# Altium PCB PCB1.PcbDoc
Units mm, origin at the board's own origin, x right, y up, seen from the top; angles counter-clockwise.
Board outline 99.82 x 55.12 mm, 2 copper layers (Top Layer, Bottom Layer); 21 components, 18 nets, 137 pads, 9 vias.
Unrouted connection lines stored in the file: 1.
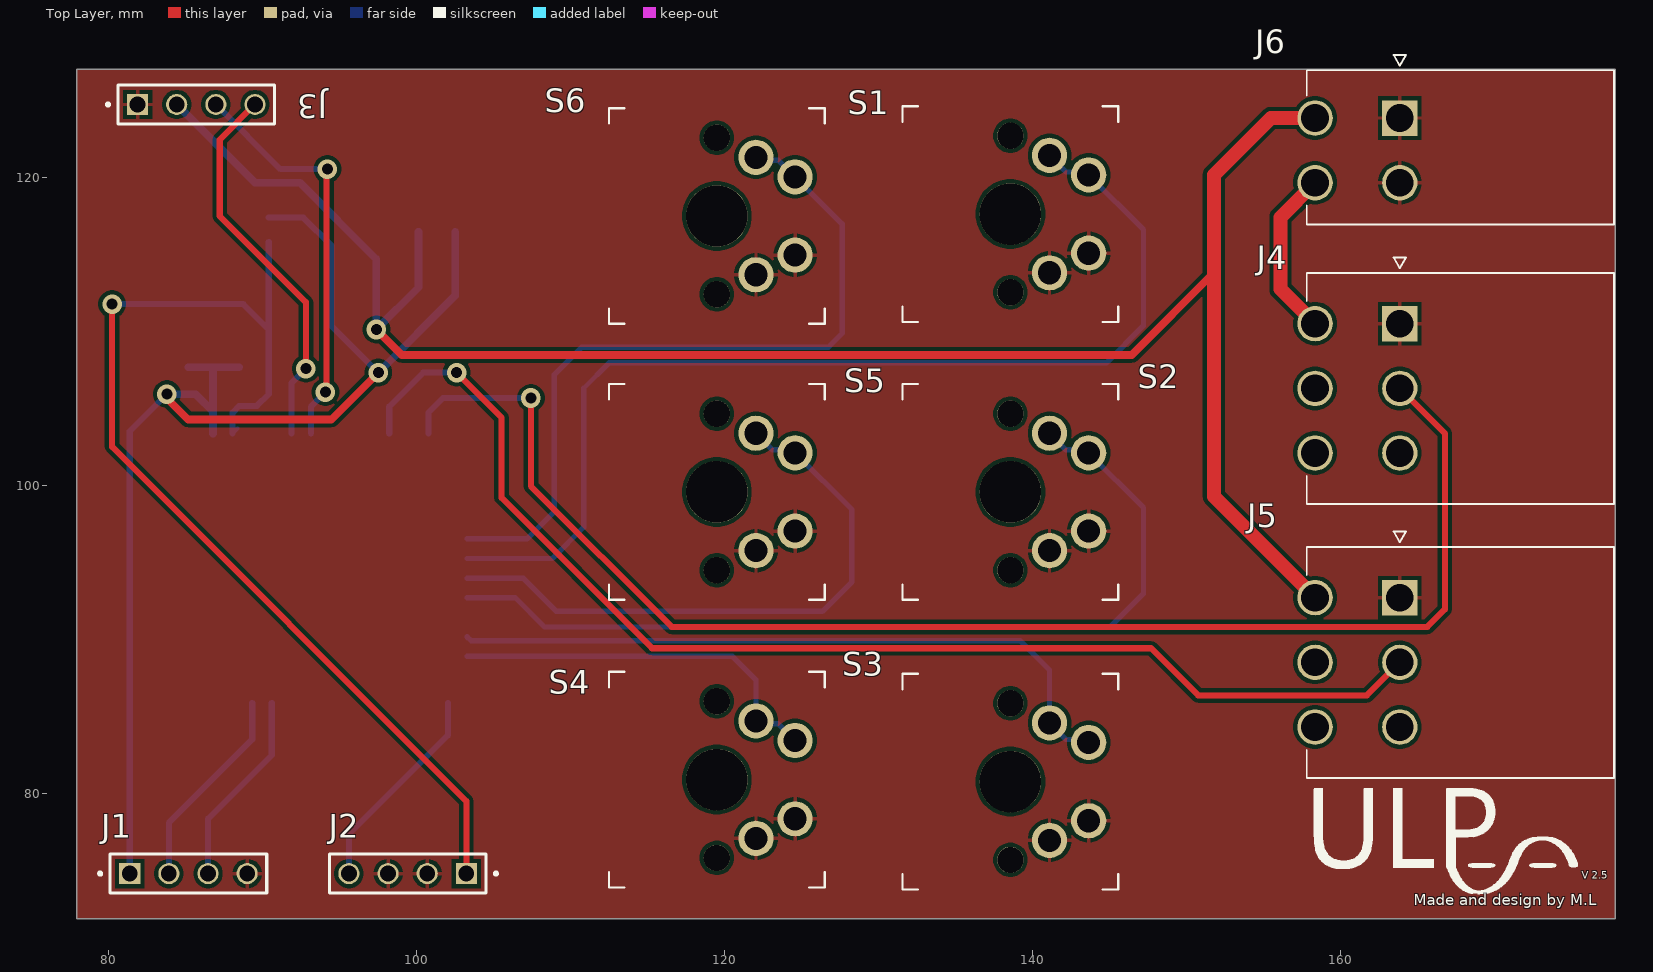
[diagram p0: Top Layer view]
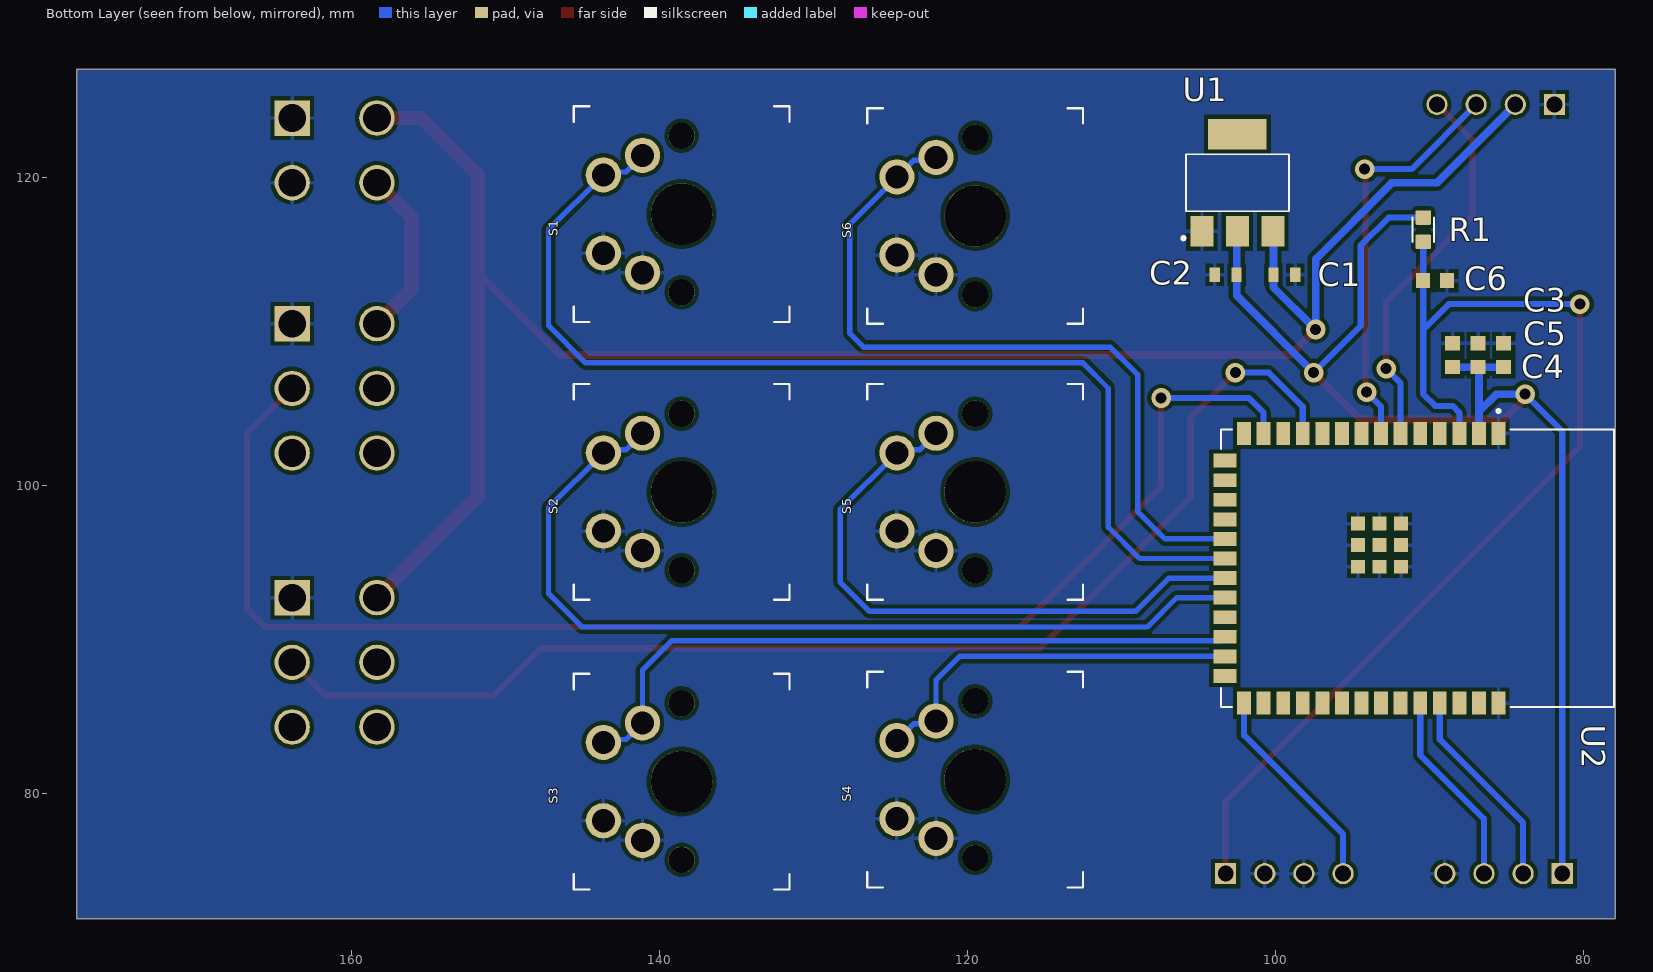
[diagram p1: Bottom Layer view, seen from below]
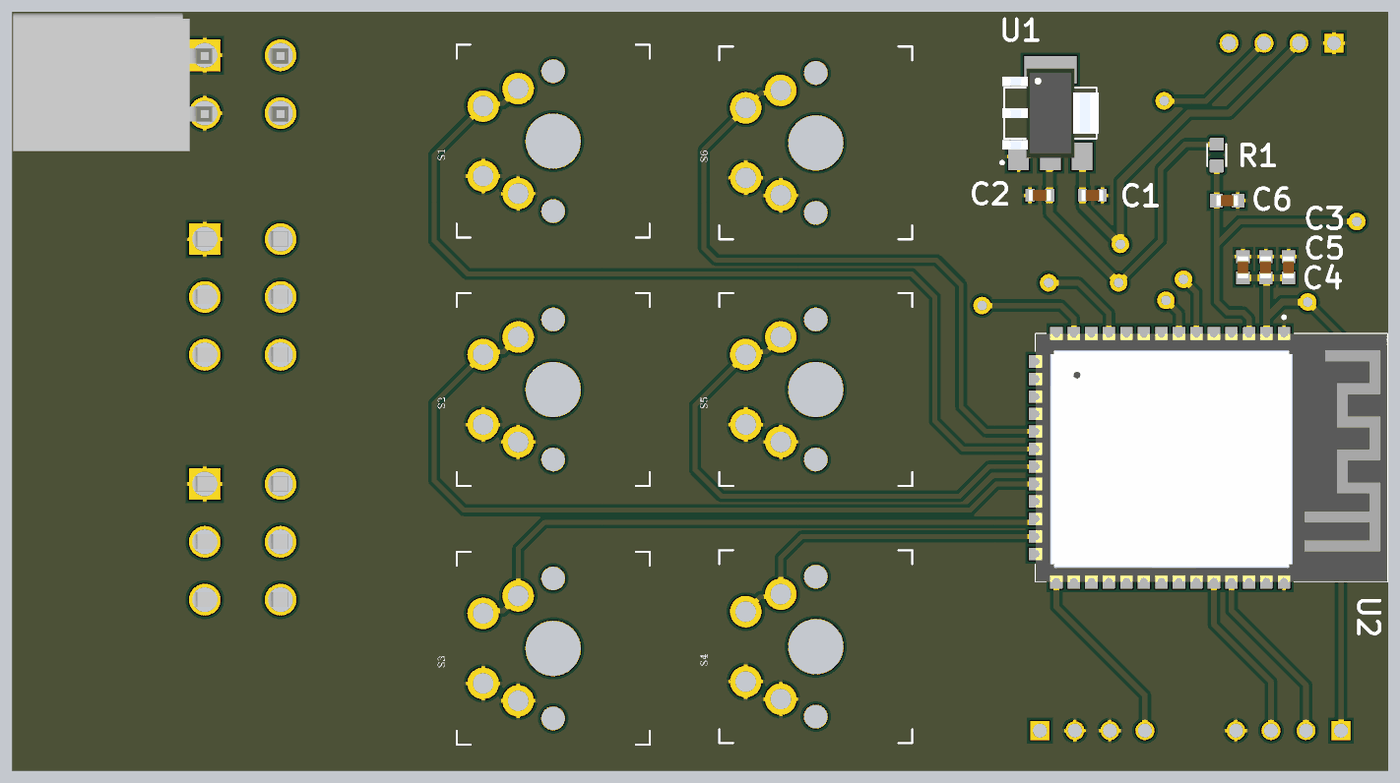
[diagram p2: 3D render of the assembled board from below, using the file's embedded part models]

## Layer stack, top to bottom
Top Solder: solder mask 0.0102, Solder Resist, Dk 3.5
Top Layer: signal copper 0.0356
Dielectric 1: dielectric 0.32, FR-4, Dk 4.8
Bottom Layer: signal copper 0.0356
Bottom Solder: solder mask 0.0102, Solder Resist, Dk 3.5

## Board outline
77.978,71.882 177.8,71.882 177.8,127 77.978,127

## Design rules (kind name [scope] priority, off if disabled: settings)
Clearance [All] p1: gap=0.254 ignorepadtopadclearanceinfootprint=FALSE except(0: Arc-Hole Track-Hole SMDPad-Hole THPad-Hole Via-Hole Fill-Hole Poly-Hole Region-Hole Text-Hole; 0.33: Arc-THPad Track-THPad)
PolygonConnect [All] p1: connectstyle=Relief reliefconductorwidth=0.254 reliefentries=4 polygonreliefangle="90 Angle" airgapwidth=0.254
RoutingVias [All] p1: holewidth=0.711 width=1.27 viastyle="Through Hole" minholewidth=0.711 minwidth=1.27 maxholewidth=0.711 maxwidth=1.27
SolderMaskExpansion [All] p1: expansion=0.102 istentingtop=FALSE
Width [All] p1: maxlimit=1 minlimit=0.254 preferedwidth=0.254 minimp=50.000000 maximp=50.000000 favimp=50.000000
30 further rules are at their usual default settings.

## Components (designator, comment, footprint, x,y, rotation, side; value= is the part's Value field where it differs from the comment)
C1 "CL10A106MO8NQNC" CAPC1608X90N#1 99.441,113.665 r0 bottom
C2 "CL10A106MO8NQNC" CAPC1608X90N#1 103.251,113.665 r180 bottom
C3 "06035C104KAT2A" CAPC1608X90N#2 88.519,108.445 r90 bottom
C4 "06035C104KAT2A" CAPC1608X90N#2 85.217,108.445 r90 bottom
C5 "06035C104KAT2A" CAPC1608X90N#2 86.868,108.445 r90 bottom
C6 "06035C104KAT2A" CAPC1608X90N#2 89.662,113.284 r0 bottom
J1 "TSW-104-23-F-S" SAMTEC_TSW-104-23-F-S 81.407,74.803 r0 top
J2 "TSW-104-23-F-S" SAMTEC_TSW-104-23-F-S 103.251,74.803 r180 top
J3 "TSW-104-23-F-S" SAMTEC_TSW-104-23-F-S 81.915,124.714 r0 top
J4 "874270602" *MOLEX_874270602 163.83,110.49 r90 top
J5 "874270602" *MOLEX_874270602 163.83,92.71 r90 top
J6 "353180420" *MOLEX_353180420 163.83,123.834 r90 top
R1 "0603SAF1002T5E" RESC1608X50N 90.424,116.586 r90 bottom
S1 "TL1107BF130WQ" SW_MX_reversible 138.557,117.602 r270 top
S2 "TL1107BF130WQ" SW_MX_reversible 138.557,99.568 r270 top
S3 "TL1107BF130WQ" SW_MX_reversible 138.557,80.772 r270 top
S4 "TL1107BF130WQ" SW_MX_reversible 119.507,80.899 r270 top
S5 "TL1107BF130WQ" SW_MX_reversible 119.507,99.568 r270 top
S6 "TL1107BF130WQ" SW_MX_reversible 119.507,117.475 r270 top
U1 "LD1117AS33TR" SOT230P700X180-4N 102.489,119.634 r180 bottom
U2 "ESP32-S3-WROOM-1-N4R2" XCVR_ESP32-S3-WROOM-1-N4R2 90.805,94.615 r270 bottom

## Footprints (in the part's own frame and the unit in brackets; to place one, negate y for a bottom-side part, rotate by r counter-clockwise, add the part's x,y. Pads: shape width x height; smd on the part's side, far side on the other; paste and mask are expansions set on the pad)
*MOLEX_353180420 [mm]
  rect 2.3x2.3 hole 1.8: 1(0,0)
  round 2.3 hole 1.8: 2(-4.2,0) 3(0,5.5) 4(-4.2,5.5)
  silkscreen extent -6.9,-13.9 4.1,6.04, body extent -6.96,-13.89 3.04,6.04, height 6.4
*MOLEX_874270602 [mm]
  rect 2.3x2.3 hole 1.8: 1(0,0)
  round 2.3 hole 1.8: 2(-4.2,0) 3(-8.4,0) 4(0,5.5) 5(-4.2,5.5) 6(-8.4,5.5)
  silkscreen extent -11.7,-13.9 4.3,6.04, body extent -11.68,-13.9 3.32,6.03, height 11.4
CAPC1608X90N#1 [mil]
  rect 26x37 smd: 1(-28,0) 2(28,0)
  body extent -31,-16 31,16, height 18
CAPC1608X90N#2 [mil]
  rect 36.22x38.58 smd: 1(-30.51,0) 2(30.51,0)
  body extent -31,-16 31,16, height 35
RESC1608X50N [mm]
  rrect20% 0.94x1.02 smd: 1(-0.79,0) 2(0.79,0)
  silkscreen extent -0.8,-0.69 0.8,0.69
SAMTEC_TSW-104-23-F-S [mm]
  rect 1.37x1.37 hole 1.02: 01(0,0)
  round 1.37 hole 1.02: 02(2.54,0) 03(5.08,0) 04(7.62,0)
  silkscreen extent -2.02,-1.27 8.89,1.27
SOT230P700X180-4N [mm]
  rect 1.5x2 smd: 1(-2.3,-3.15) 2(0,-3.15) 3(2.3,-3.15)
  rect 3.8x2 smd: 4(0,3.15)
  silkscreen extent -3.6,-3.7 3.35,1.85, body extent -3.5,-3.25 3.5,3.25, height 1.8
SW_MX_reversible [mil]
  round 90 hole 59: 1(-150,100) 1(-100,200) 2(100,200) 2(150,100)
  round 157 hole 157: Un1(0,0)
  round 67 hole 67: Un2(200,0) Un3(-200,0)
  silkscreen extent -276,-276 276,276
XCVR_ESP32-S3-WROOM-1-N4R2 [mm]
  rect 1.5x0.9 smd: 1(-8.75,5.26) 2(-8.75,3.99) 3(-8.75,2.72) 4(-8.75,1.45) 5(-8.75,0.18) 6(-8.75,-1.09) 7(-8.75,-2.36) 8(-8.75,-3.63) 9(-8.75,-4.9) 10(-8.75,-6.17) 11(-8.75,-7.44) 12(-8.75,-8.71) 13(-8.75,-9.98) 14(-8.75,-11.25) 27(8.75,-11.25) 28(8.75,-9.98) 29(8.75,-8.71) 30(8.75,-7.44) 31(8.75,-6.17) 32(8.75,-4.9) 33(8.75,-3.63) 34(8.75,-2.36) 35(8.75,-1.09) 36(8.75,0.18) 37(8.75,1.45) 38(8.75,2.72) 39(8.75,3.99) 40(8.75,5.26)
  rect 0.9x1.5 smd: 15(-6.985,-12.5) 16(-5.715,-12.5) 17(-4.445,-12.5) 18(-3.175,-12.5) 19(-1.905,-12.5) 20(-0.635,-12.5) 21(0.635,-12.5) 22(1.905,-12.5) 23(3.175,-12.5) 24(4.445,-12.5) 25(5.715,-12.5) 26(6.985,-12.5)
  rect 0.9x0.9 smd: 41_1(-1.5,-2.46) 41_2(-2.9,-2.46) 41_3(-0.1,-2.46) 41_4(-2.9,-3.86) 41_5(-1.5,-3.86) 41_6(-0.1,-3.86) 41_7(-2.9,-1.06) 41_8(-1.5,-1.06) 41_9(-0.1,-1.06)
  silkscreen extent -10.3,-12.75 9,12.75, body extent -9,-12.75 9,12.75, height 3.25

## Part data
C1 C2: "Cap Ceramic 10uF 16V X5R 20% SMD 0603 85Â°C Paper T/R", Package=None, Availability=Unavailable, MF="{'manufacturer': u'Samsung Electro-Mechanics'}", MP=CL10A106MO8NQNC, Price=None
C3 C4 C5 C6: "CAPACITOR, 0603, 100NF, 50V, X7R; Application:Standard; Capacitance:100000pF; Capacitance Tolerance:Â± 10%; Series:06035C; Voltage, Rating:50V dc; Capacitor Dielectric Type:Ceramic Multi-Layer; Case Style:0603; Termination Type:SMD; Dielectric Characteristic:X7R; Max Operating Temperature:125Â°C; Min Temperature Operating:-55Â°C; Operating Temperature Range:-55Â°C to +125Â°C; Terminal Type:Surface Mount (SMD, SMT); Tolerance, +:10%; Tolerance, -:10%; Voltage Rating, DC:50V", Package=None, Availability=Unavailable, MF="{'manufacturer': u'AVX'}", MP=06035C104KAT2A, Price=None
J1 J2 J3 S1 S2 S3 S4 S5 S6 U1 U2: Package=None, Availability=Unavailable, Price=None
  J1 J2 J3: MF="{'manufacturer': u'Samtec'}", MP=TSW-104-23-F-S
  S1 S2 S3 S4 S5 S6: MF="{'manufacturer': u'E-Switch'}", MP=TL1107BF130WQ
  U1: MF="{'manufacturer': u'STMicroelectronics'}", MP=LD1117AS33TR
  U2: MF="{'manufacturer': u'Espressif Systems'}", MP=ESP32-S3-WROOM-1-N4R2
J6: "Connector Header Through Hole, Right Angle 4 position 0.165in (4.20mm)", Package=None, Availability=Unavailable, MF="{'manufacturer': u'Molex'}", MP=353180420, Price=None
R1: library part RP73PF1J10KBTDF, "0603 10k ohm", Package=None, Availability=Unavailable, MF="{'manufacturer': u'TE Connectivity'}", MP=RP73PF1J10KBTDF, Price=None

## Via types
v1: diameter 1.27, hole 0.711, Top Layer to Bottom Layer, 9 vias

## Nets (pads, with @x,y where several pads share a name; then routed paths per layer and width w, separated by ;. In a path a pad name is that pad's centre, name@x,y a point inside that pad or via, vN(x,y) a via of type N, cw(c..) or ccw(c..) an arc to the next point about the centre after c; other vN are vias at no path point)
+3.3V: C2.2 C3.1 C4.1 C5.1 J1.01 R1.2 U1.2 U2.2 | length 84.6
  Top Layer w0.254: v1@83.82,105.643 v1(83.82,105.918)
  Top Layer w0.5: v1@83.82,105.643 85.196,104.267 94.488,104.267 v1(97.536,107.315)
  Bottom Layer w0.254: C5.1@86.815,107.617 C5.1 ; U1.2 U1.2@102.54,116.433
  Bottom Layer w0.4: J1.01 81.407,103.505 v1(83.82,105.918) ; R1.2 92.682,117.376 94.488,115.57 94.488,110.363 v1(97.536,107.315)
  Bottom Layer w0.5: v1(83.82,105.918) 85.672,105.918 86.815,104.775 ; C4.1 C5.1 C3.1 ; U2.2 86.815,104.775 ; C5.1@86.815,107.617 86.815,104.775 ; v1(97.536,107.315) 102.54,112.319 U1.2@102.54,116.433
+5V: C1.2 J3.02 J5.4 J6.3 U1.3 | length 124.7
  Top Layer w0.5: v1(97.409,110.109) 99.06,108.458 146.431,108.458 151.765,113.792
  Top Layer w0.9: J5.4 151.765,99.275 151.765,113.792 151.765,120.142 155.457,123.834 J6.3
  Bottom Layer w0.254: U1.3@100.152,116.447 U1.3
  Bottom Layer w0.5: J3.02 89.535,119.634 92.456,119.634 97.409,114.681 v1(97.409,110.109) 100.152,112.852 C1.2 U1.3@100.152,116.447
+5V2: J4.4 J6.4 | length 11
  Top Layer w0.9: J4.4 156.083,112.737 156.083,117.387 J6.4
GND: C1.1 C2.1 C3.2 C4.2 C5.2 C6.1 J1.04 J2.02 J2.03 J3.01 J4.1 J5.1 J6.1 J6.2 S1.2 S2.2 S3.2 S4.2 S5.2 S6.2 U1.1 U2.1 U2.40 U2.41_1 U2.41_2 U2.41_3 U2.41_4 U2.41_5 U2.41_6 U2.41_7 U2.41_8 U2.41_9
NetC6_2: C6.2 J2.01 R1.1 U2.3 | length 71.9
  Top Layer w0.4: v1(80.264,111.76) 80.264,102.489 103.251,79.502 J2.01
  Bottom Layer w0.254: U2.3 U2.3@88.408,103.688 ; C6.2@90.424,113.271 C6.2 C6.2@90.424,113.297
  Bottom Layer w0.4: v1(80.264,111.76) 88.773,111.76 90.424,110.109 ; U2.3 88.085,104.722 88.519,105.156 89.662,105.156 90.424,105.918 90.424,110.109 ; C6.2@90.424,113.271 90.424,110.109 ; C6.2@90.424,113.297 R1.1
NetJ1_02: J1.02 U2.37 | length 13.3
  Bottom Layer w0.4: J1.02 83.947,78.105 89.355,83.513 U2.37
NetJ1_03: J1.03 U2.36 | length 12.8
  Bottom Layer w0.4: J1.03 86.487,78.359 90.625,82.497 U2.36
NetJ2_04: J2.04 U2.27 | length 13.7
  Bottom Layer w0.4: J2.04 95.631,77.343 102.055,83.767 U2.27
NetJ3_03: J3.03 U2.7 | length 26.6
  Top Layer w0.4: v1(94.107,106.045) 94.17,106.108 94.17,120.459 v1(94.234,120.523)
  Bottom Layer w0.4: J3.03 91.186,120.523 v1(94.234,120.523) ; U2.7 93.165,105.103 v1(94.107,106.045)
NetJ3_04: J3.04 U2.6 | length 25
  Top Layer w0.4: J3.04 87.249,122.428 87.249,117.475 92.837,111.887 v1(92.837,107.569)
  Bottom Layer w0.4: U2.6 91.895,106.627 v1(92.837,107.569)
NetJ4_2: J4.2 U2.13 | length 93.2
  Top Layer w0.4: v1(107.442,105.664) 107.442,99.949 116.586,90.805 165.608,90.805 166.751,91.948 166.751,103.369 J4.2
  Bottom Layer w0.4: U2.13 100.785,104.722 101.727,105.664 v1(107.442,105.664)
NetJ5_2: J5.2 U2.11 | length 80.9
  Top Layer w0.4: v1(102.616,107.315) 105.537,104.394 105.537,99.187 115.269,89.455 115.301,89.423 147.686,89.423 150.749,86.36 161.68,86.36 J5.2
  Bottom Layer w0.4: U2.11 98.245,105.103 100.457,107.315 v1(102.616,107.315)
NetS1_1: S1.1 U2.20 | length 69.7
  Bottom Layer w0.254: S1.1@143.445,120.334 S1.1@143.637,120.142
  Bottom Layer w0.35: U2.20 108.839,95.25 110.871,97.282 110.871,106.299 112.522,107.95 144.78,107.95 147.193,110.363 147.193,116.586 S1.1@143.637,120.142 ; S1.1@141.097,121.412 142.175,120.334 S1.1@143.445,120.334
NetS2_1: S2.1 U2.22 | length 59.3
  Bottom Layer w0.254: S2.1@143.445,102.3 S2.1@143.637,102.108
  Bottom Layer w0.35: U2.22 106.426,92.71 108.331,90.805 145.034,90.805 147.193,92.964 147.193,98.552 S2.1@143.637,102.108 ; S2.1@141.097,103.378 142.175,102.3 S2.1@143.445,102.3
NetS3_1: S3.1 U2.24 | length 45.2
  Bottom Layer w0.254: S3.1@143.445,83.504 S3.1@143.637,83.312
  Bottom Layer w0.35: U2.24 103.559,89.916 139.192,89.916 141.097,88.011 141.097,84.582 142.175,83.504 S3.1@143.445,83.504
NetS4_1: S4.1 U2.25 | length 25.1
  Bottom Layer w0.254: S4.1@122.047,84.709 S4.1@122.239,84.517
  Bottom Layer w0.35: U2.25 120.523,88.9 122.047,87.376 S4.1@122.047,84.709 ; S4.1@122.239,84.517 123.509,84.517 S4.1@124.587,83.439
NetS5_1: S5.1 U2.21 | length 39.6
  Bottom Layer w0.254: S5.1@124.395,102.3 S5.1@124.587,102.108
  Bottom Layer w0.35: U2.21 106.934,93.98 109.093,91.821 126.365,91.821 128.27,93.726 128.27,98.425 S5.1@124.587,102.108 ; S5.1@122.047,103.378 123.125,102.3 S5.1@124.395,102.3
NetS6_1: S6.1 U2.19 | length 49.5
  Bottom Layer w0.254: S6.1@122.047,121.285 S6.1@122.239,121.093
  Bottom Layer w0.35: U2.19 107.188,96.52 108.966,98.298 108.966,107.188 110.744,108.966 126.746,108.966 127.635,109.855 127.635,116.967 124.587,120.015 123.509,121.093 S6.1@122.239,121.093
pads on no net: J4.3 J4.5 J4.6 J5.3 J5.5 J5.6 S1.Un1 S1.Un2 S1.Un3 S2.Un1 S2.Un2 S2.Un3 S3.Un1 S3.Un2 S3.Un3 S4.Un1 S4.Un2 S4.Un3 S5.Un1 S5.Un2 S5.Un3 S6.Un1 S6.Un2 S6.Un3 U1.4 U2.4 U2.5 U2.8 U2.9 U2.10 U2.12 U2.14 U2.15 U2.16 U2.17 U2.18 U2.23 U2.26 U2.28 U2.29 U2.30 U2.31 U2.32 U2.33 U2.34 U2.35 U2.38 U2.39

## Polygon pours and split planes (outlines as drawn)
GND on Bottom Layer "NONET_L-01_P-001" (solid, pour order 2): 77.978,127 77.978,71.882 177.8,71.882 177.8,127
GND on Top Layer "NONET_L-01_P-001" (solid, pour order 1): 77.978,127 77.978,71.882 177.8,71.882 177.8,127

## Silkscreen, mask and mechanical layers (free items; w line width, h text height)
Top Overlay:
  drawing of 5 lines, arcs and shapes, not listed
  text "V 2.5" at 175.641,74.303 h0.8
  text "Made and design by M.L" at 164.719,72.488 h1.2